# EAGLE board Qwiic_pHat_for_Raspberry_Pi_v30-Panel (EAGLE 9.4.2)
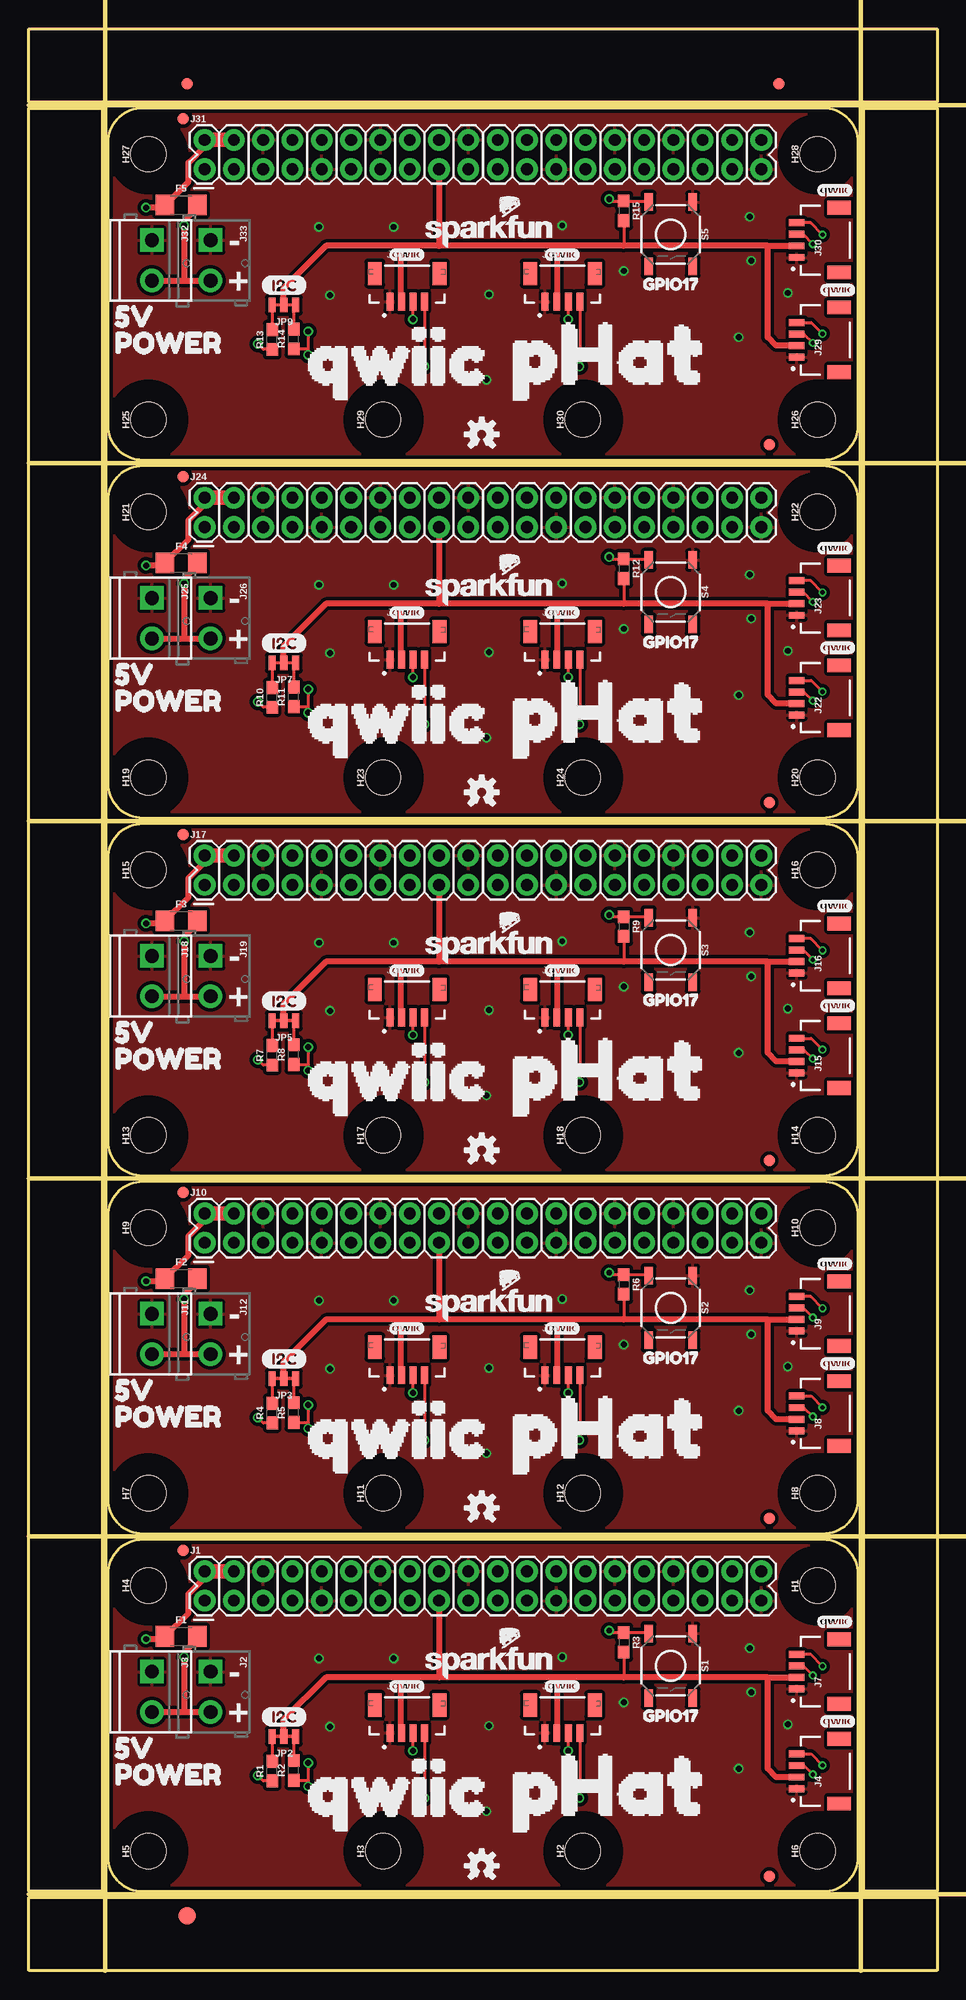
[diagram p0: board, top side]
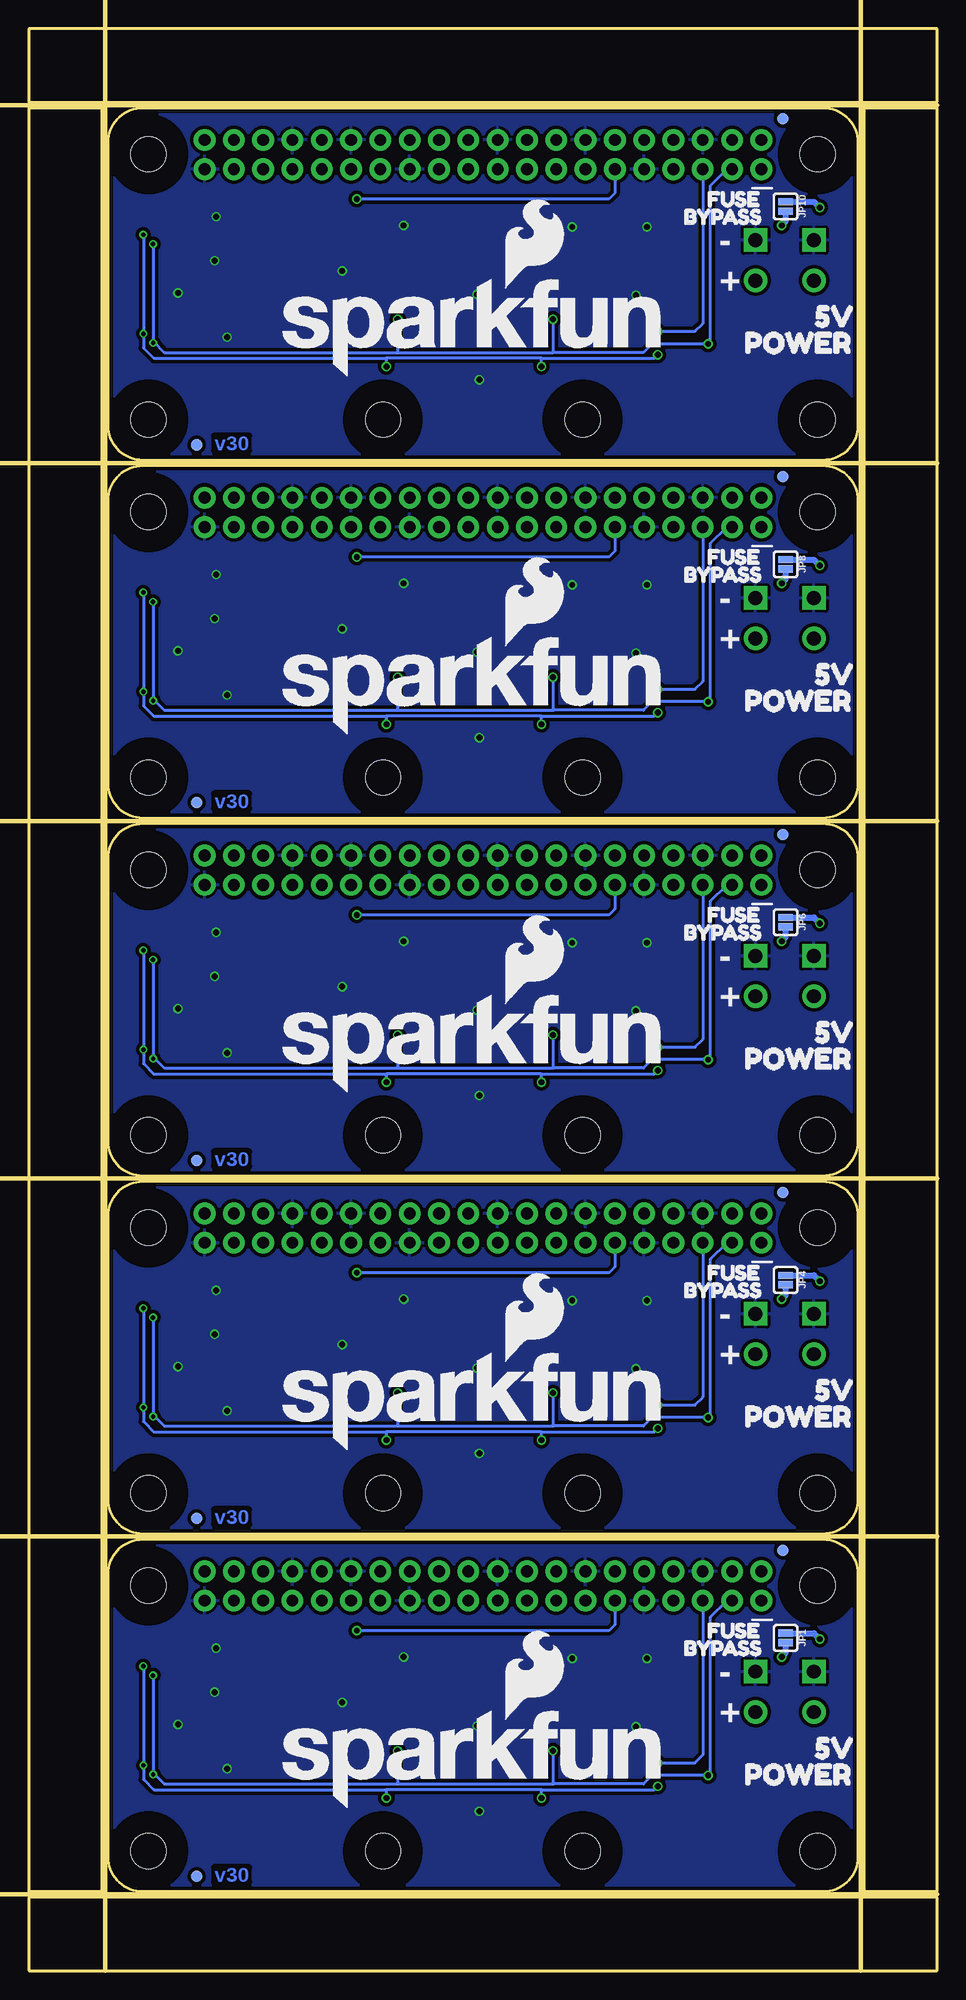
[diagram p1: board, bottom side, seen from below]

Size 78.72 x 168.25 mm. Coordinates in mm from the lower left corner, seen from the top.
Outline: 9.86,6.86 68.86,6.86 arc90 71.86,9.86 71.86,34.36 arc90 68.86,37.36 9.86,37.36 arc90 6.86,34.36 6.86,9.86 arc90 9.86,6.86
Outline: 9.86,37.87 68.86,37.87 arc90 71.86,40.87 71.86,65.37 arc90 68.86,68.37 9.86,68.37 arc90 6.86,65.37 6.86,40.87 arc90 9.86,37.87
Outline: 9.86,68.87 68.86,68.87 arc90 71.86,71.87 71.86,96.37 arc90 68.86,99.37 9.86,99.37 arc90 6.86,96.37 6.86,71.87 arc90 9.86,68.87
Outline: 9.86,99.88 68.86,99.88 arc90 71.86,102.88 71.86,127.38 arc90 68.86,130.38 9.86,130.38 arc90 6.86,127.38 6.86,102.88 arc90 9.86,99.88
Outline: 9.86,130.89 68.86,130.89 arc90 71.86,133.89 71.86,158.39 arc90 68.86,161.39 9.86,161.39 arc90 6.86,158.39 6.86,133.89 arc90 9.86,130.89
Outline: 0,6.35 78.72,6.35 78.72,0 0,0 0,6.35
Outline: 72.37,161.39 78.72,161.39 78.72,6.86 72.37,6.86 72.37,161.39
Outline: 0,168.25 78.72,168.25 78.72,161.9 0,161.9 0,168.25
Outline: 0,161.39 6.35,161.39 6.35,6.86 0,6.86 0,161.39
Copper layers (1*16): Top 0.035mm / dielectric 1.5mm / Bottom 0.035mm
Design rules "SparkFun-2-layer-PCBWay-LIMIT": minimum track width 6mil, minimum drill 0.3mm, track to track 6mil, track to pad 6mil, pad to pad 6mil, via to via 6mil, smd to smd 6mil, copper to edge 6mil, drill to drill 6mil, minimum pad ring 6mil, minimum via ring 6mil, stop-mask expansion 4mil, vias tented up to drill 25mil, thermal gap 10mil
Net classes: 0 Default: width 0.178 mm; 1 vcc: width 0.178 mm
tRestrict: area 7.2,7.2 to 13.5,13.5; area 65.2,7.2 to 71.5,13.5; area 65.2,30.2 to 71.5,36.5; area 7.2,30.2 to 13.5,36.5; area 44.9,7.2 to 51.2,13.5; area 27.6,7.2 to 33.9,13.5; area 7.2,38.2 to 13.5,44.5; area 65.2,38.2 to 71.5,44.5; area 65.2,61.2 to 71.5,67.5; area 7.2,61.2 to 13.5,67.5; area 44.9,38.2 to 51.2,44.5; area 27.6,38.2 to 33.9,44.5; area 7.2,69.2 to 13.5,75.5; area 65.2,69.2 to 71.5,75.5; area 65.2,92.2 to 71.5,98.5; area 7.2,92.2 to 13.5,98.5; area 44.9,69.2 to 51.2,75.5; area 27.6,69.2 to 33.9,75.5; area 7.2,100.2 to 13.5,106.5; area 65.2,100.2 to 71.5,106.5; area 65.2,123.2 to 71.5,129.5; area 7.2,123.2 to 13.5,129.5; area 44.9,100.2 to 51.2,106.5; area 27.6,100.2 to 33.9,106.5; area 7.2,131.2 to 13.5,137.5; area 65.2,131.2 to 71.5,137.5; area 65.2,154.2 to 71.5,160.5; area 7.2,154.2 to 13.5,160.5; area 44.9,131.2 to 51.2,137.5; area 27.6,131.2 to 33.9,137.5
bRestrict: area 65.2,7.2 to 71.5,13.5; area 7.2,7.2 to 13.5,13.5; area 7.2,30.2 to 13.5,36.5; area 65.2,30.2 to 71.5,36.5; area 44.9,7.2 to 51.2,13.5; area 27.6,7.2 to 33.9,13.5; area 65.2,38.2 to 71.5,44.5; area 7.2,38.2 to 13.5,44.5; area 7.2,61.2 to 13.5,67.5; area 65.2,61.2 to 71.5,67.5; area 44.9,38.2 to 51.2,44.5; area 27.6,38.2 to 33.9,44.5; area 65.2,69.2 to 71.5,75.5; area 7.2,69.2 to 13.5,75.5; area 7.2,92.2 to 13.5,98.5; area 65.2,92.2 to 71.5,98.5; area 44.9,69.2 to 51.2,75.5; area 27.6,69.2 to 33.9,75.5; area 65.2,100.2 to 71.5,106.5; area 7.2,100.2 to 13.5,106.5; area 7.2,123.2 to 13.5,129.5; area 65.2,123.2 to 71.5,129.5; area 44.9,100.2 to 51.2,106.5; area 27.6,100.2 to 33.9,106.5; area 65.2,131.2 to 71.5,137.5; area 7.2,131.2 to 13.5,137.5; area 7.2,154.2 to 13.5,160.5; area 65.2,154.2 to 71.5,160.5; area 44.9,131.2 to 51.2,137.5; area 27.6,131.3 to 33.9,137.6
Milling: 8 lines

## Footprints (pad centres in the part's own frame; a part is rotated, then mirrored left to right if it is on the bottom)
FIDUCIAL-1X2 = smd 1 x 1: 1 0,0
FIDUCIAL-1.5X3 = smd 1.5 x 1.5: 1 0,0
1206 = smd 1.6 x 1.8: 1 -1.4,0; 2 1.4,0
STAND-OFF-TIGHT = hole 3.048: 0,0
2X20 = drill 1.016 pad 1.88: 1 0,0; 2 0,2.54; 3 2.54,0; 4 2.54,2.54; 5 5.08,0; 6 5.08,2.54; 7 7.62,0; 8 7.62,2.54; 9 10.16,0; 10 10.16,2.54; 11 12.7,0; 12 12.7,2.54; 13 15.24,0; 14 15.24,2.54; 15 17.78,0; 16 17.78,2.54; 17 20.32,0; 18 20.32,2.54; 19 22.86,0; 20 22.86,2.54; 21 25.4,0; 22 25.4,2.54; 23 27.94,0; 24 27.94,2.54; 25 30.48,0; 26 30.48,2.54; 27 33.02,0; 28 33.02,2.54; 29 35.56,0; 30 35.56,2.54; 31 38.1,0; 32 38.1,2.54; 33 40.64,0; 34 40.64,2.54; 35 43.18,0; 36 43.18,2.54; 37 45.72,0; 38 45.72,2.54; 39 48.26,0; 40 48.26,2.54
SCREWTERMINAL-3.5MM-2-NS = drill 1.2 pad 2.032 square: 1 0,0 | drill 1.2 pad 2.032: 2 3.5,0
SCREWTERMINAL-3.5MM-2 = drill 1.2 pad 2.032 square: 1 0,0 | drill 1.2 pad 2.032: 2 3.5,0
JST04_1MM_RA = smd 0.6 x 1.35: 1 -1.5,0; 2 -0.5,0; 3 0.5,0; 4 1.5,0 | smd 1.2 x 2: NC1 2.8,-3.675; NC2 -2.8,-3.675
JST04_1MM_VERT = smd 0.6 x 1.55: 1 0.3,0.775; 2 1.3,0.775; 3 2.3,0.775; 4 3.3,0.775 | smd 1.2 x 2: NC1 -1,3.2; NC2 4.6,3.2
SMT-JUMPER_2_NO_SILK = smd 0.635 x 1.27: 1 -0.406,0; 2 0.406,0
SMT-JUMPER_3_2-NC_TRACE_NO-SILK = smd 0.635 x 1.27: 1 -1.016,0; 2 0,0; 3 1.016,0
0603 = smd 1.1 x 1: 1 -0.85,0; 2 0.85,0
TACTILE_SWITCH_SMD_5.2MM = smd 1.524 x 0.762: 1 -2.794,1.905; 2 2.794,1.905; 3 -2.794,-1.905; 4 2.794,-1.905

## Placement (x,y rotation side)
E$1  [FIDUCIAL-1X2]  13.72,163.49 0 top
E$2  [FIDUCIAL-1X2]  65,163.49 0 top
E$3  [FIDUCIAL-1.5X3]  13.72,4.76 0 top
F1  6V/0.75A  [1206]  13.21,28.96 0 top
F2  6V/0.75A  [1206]  13.21,59.96 0 top
F3  6V/0.75A  [1206]  13.21,90.97 0 top
F4  6V/0.75A  [1206]  13.21,121.98 0 top
F5  6V/0.75A  [1206]  13.21,152.99 0 top
FD1  FIDUCIAL1X2  [FIDUCIAL-1X2]  13.38,36.42 180 top
FD2  FIDUCIAL1X2  [FIDUCIAL-1X2]  64.19,8.17 180 top
FD3  FIDUCIAL1X2  [FIDUCIAL-1X2]  64.19,8.17 0 bottom
FD4  FIDUCIAL1X2  [FIDUCIAL-1X2]  13.38,36.42 0 bottom
FD5  FIDUCIAL1X2  [FIDUCIAL-1X2]  13.38,67.43 180 top
FD6  FIDUCIAL1X2  [FIDUCIAL-1X2]  64.19,39.18 180 top
FD7  FIDUCIAL1X2  [FIDUCIAL-1X2]  64.19,39.18 0 bottom
FD8  FIDUCIAL1X2  [FIDUCIAL-1X2]  13.38,67.43 0 bottom
FD9  FIDUCIAL1X2  [FIDUCIAL-1X2]  13.38,98.43 180 top
FD10  FIDUCIAL1X2  [FIDUCIAL-1X2]  64.19,70.19 180 top
FD11  FIDUCIAL1X2  [FIDUCIAL-1X2]  64.19,70.18 0 bottom
FD12  FIDUCIAL1X2  [FIDUCIAL-1X2]  13.38,98.43 0 bottom
FD13  FIDUCIAL1X2  [FIDUCIAL-1X2]  13.38,129.44 180 top
FD14  FIDUCIAL1X2  [FIDUCIAL-1X2]  64.19,101.2 180 top
FD15  FIDUCIAL1X2  [FIDUCIAL-1X2]  64.19,101.19 0 bottom
FD16  FIDUCIAL1X2  [FIDUCIAL-1X2]  13.38,129.44 0 bottom
FD17  FIDUCIAL1X2  [FIDUCIAL-1X2]  13.38,160.45 180 top
FD18  FIDUCIAL1X2  [FIDUCIAL-1X2]  64.19,132.2 180 top
FD19  FIDUCIAL1X2  [FIDUCIAL-1X2]  64.19,132.2 0 bottom
FD20  FIDUCIAL1X2  [FIDUCIAL-1X2]  13.38,160.45 0 bottom
FRAME1  FRAME-LETTER  [CREATIVE_COMMONS]  5.33,-6.1 0 top  (outside the outline)
FRAME2  FRAME-LETTER  [CREATIVE_COMMONS]  5.33,24.91 0 top
FRAME3  FRAME-LETTER  [CREATIVE_COMMONS]  5.33,55.92 0 top
FRAME4  FRAME-LETTER  [CREATIVE_COMMONS]  5.33,86.93 0 top
FRAME5  FRAME-LETTER  [CREATIVE_COMMONS]  5.33,117.94 0 top
H1  STAND-OFFTIGHT  [STAND-OFF-TIGHT]  68.36,33.36 90 top
H2  STAND-OFFTIGHT  [STAND-OFF-TIGHT]  48.01,10.36 90 top
H3  STAND-OFFTIGHT  [STAND-OFF-TIGHT]  30.7,10.36 90 top
H4  STAND-OFFTIGHT  [STAND-OFF-TIGHT]  10.36,33.36 90 top
H5  STAND-OFFTIGHT  [STAND-OFF-TIGHT]  10.36,10.36 90 top
H6  STAND-OFFTIGHT  [STAND-OFF-TIGHT]  68.36,10.36 90 top
H7  STAND-OFFTIGHT  [STAND-OFF-TIGHT]  10.36,41.37 90 top
H8  STAND-OFFTIGHT  [STAND-OFF-TIGHT]  68.36,41.37 90 top
H9  STAND-OFFTIGHT  [STAND-OFF-TIGHT]  10.36,64.37 90 top
H10  STAND-OFFTIGHT  [STAND-OFF-TIGHT]  68.36,64.37 90 top
H11  STAND-OFFTIGHT  [STAND-OFF-TIGHT]  30.7,41.37 90 top
H12  STAND-OFFTIGHT  [STAND-OFF-TIGHT]  48.01,41.37 90 top
H13  STAND-OFFTIGHT  [STAND-OFF-TIGHT]  10.36,72.37 90 top
H14  STAND-OFFTIGHT  [STAND-OFF-TIGHT]  68.36,72.37 90 top
H15  STAND-OFFTIGHT  [STAND-OFF-TIGHT]  10.36,95.37 90 top
H16  STAND-OFFTIGHT  [STAND-OFF-TIGHT]  68.36,95.37 90 top
H17  STAND-OFFTIGHT  [STAND-OFF-TIGHT]  30.7,72.37 90 top
H18  STAND-OFFTIGHT  [STAND-OFF-TIGHT]  48.01,72.37 90 top
H19  STAND-OFFTIGHT  [STAND-OFF-TIGHT]  10.36,103.38 90 top
H20  STAND-OFFTIGHT  [STAND-OFF-TIGHT]  68.36,103.38 90 top
H21  STAND-OFFTIGHT  [STAND-OFF-TIGHT]  10.36,126.38 90 top
H22  STAND-OFFTIGHT  [STAND-OFF-TIGHT]  68.36,126.38 90 top
H23  STAND-OFFTIGHT  [STAND-OFF-TIGHT]  30.7,103.38 90 top
H24  STAND-OFFTIGHT  [STAND-OFF-TIGHT]  48.01,103.38 90 top
H25  STAND-OFFTIGHT  [STAND-OFF-TIGHT]  10.36,134.39 90 top
H26  STAND-OFFTIGHT  [STAND-OFF-TIGHT]  68.36,134.39 90 top
H27  STAND-OFFTIGHT  [STAND-OFF-TIGHT]  10.36,157.39 90 top
H28  STAND-OFFTIGHT  [STAND-OFF-TIGHT]  68.36,157.39 90 top
H29  STAND-OFFTIGHT  [STAND-OFF-TIGHT]  30.7,134.39 90 top
H30  STAND-OFFTIGHT  [STAND-OFF-TIGHT]  48.01,134.39 90 top
J1  RASPBERRYPI-40-PIN-GPIO_PTH_NO_SHROUD  [2X20]  15.23,32.06 0 top
J2  [SCREWTERMINAL-3.5MM-2-NS]  15.75,25.91 270 top
J3  [SCREWTERMINAL-3.5MM-2]  10.67,25.91 270 top
J4  Qwiic Right Angle  [JST04_1MM_RA]  66.55,17.27 90 top
J5  Vertical Qwiic Connector  [JST04_1MM_VERT]  30.99,19.81 0 top
J6  Vertical Qwiic Connector  [JST04_1MM_VERT]  44.45,19.81 0 top
J7  Qwiic Right Angle  [JST04_1MM_RA]  66.55,25.91 90 top
J8  Qwiic Right Angle  [JST04_1MM_RA]  66.55,48.28 90 top
J9  Qwiic Right Angle  [JST04_1MM_RA]  66.55,56.92 90 top
J10  RASPBERRYPI-40-PIN-GPIO_PTH_NO_SHROUD  [2X20]  15.23,63.07 0 top
J11  [SCREWTERMINAL-3.5MM-2]  10.67,56.92 270 top
J12  [SCREWTERMINAL-3.5MM-2-NS]  15.75,56.92 270 top
J13  Vertical Qwiic Connector  [JST04_1MM_VERT]  30.99,50.82 0 top
J14  Vertical Qwiic Connector  [JST04_1MM_VERT]  44.45,50.82 0 top
J15  Qwiic Right Angle  [JST04_1MM_RA]  66.55,79.29 90 top
J16  Qwiic Right Angle  [JST04_1MM_RA]  66.55,87.92 90 top
J17  RASPBERRYPI-40-PIN-GPIO_PTH_NO_SHROUD  [2X20]  15.23,94.07 0 top
J18  [SCREWTERMINAL-3.5MM-2]  10.67,87.92 270 top
J19  [SCREWTERMINAL-3.5MM-2-NS]  15.75,87.92 270 top
J20  Vertical Qwiic Connector  [JST04_1MM_VERT]  30.99,81.83 0 top
J21  Vertical Qwiic Connector  [JST04_1MM_VERT]  44.45,81.83 0 top
J22  Qwiic Right Angle  [JST04_1MM_RA]  66.55,110.3 90 top
J23  Qwiic Right Angle  [JST04_1MM_RA]  66.55,118.93 90 top
J24  RASPBERRYPI-40-PIN-GPIO_PTH_NO_SHROUD  [2X20]  15.23,125.08 0 top
J25  [SCREWTERMINAL-3.5MM-2]  10.67,118.93 270 top
J26  [SCREWTERMINAL-3.5MM-2-NS]  15.75,118.93 270 top
J27  Vertical Qwiic Connector  [JST04_1MM_VERT]  30.99,112.84 0 top
J28  Vertical Qwiic Connector  [JST04_1MM_VERT]  44.45,112.84 0 top
J29  Qwiic Right Angle  [JST04_1MM_RA]  66.55,141.3 90 top
J30  Qwiic Right Angle  [JST04_1MM_RA]  66.55,149.94 90 top
J31  RASPBERRYPI-40-PIN-GPIO_PTH_NO_SHROUD  [2X20]  15.23,156.09 0 top
J32  [SCREWTERMINAL-3.5MM-2]  10.67,149.94 270 top
J33  [SCREWTERMINAL-3.5MM-2-NS]  15.75,149.94 270 top
J34  Vertical Qwiic Connector  [JST04_1MM_VERT]  30.99,143.84 0 top
J35  Vertical Qwiic Connector  [JST04_1MM_VERT]  44.45,143.84 0 top
JP1  JUMPER-SMT_2_NO_SILK  [SMT-JUMPER_2_NO_SILK]  13.13,28.83 270 bottom
JP2  PULLUP  [SMT-JUMPER_3_2-NC_TRACE_NO-SILK]  22.1,20.29 180 top
JP3  PULLUP  [SMT-JUMPER_3_2-NC_TRACE_NO-SILK]  22.1,51.3 180 top
JP4  JUMPER-SMT_2_NO_SILK  [SMT-JUMPER_2_NO_SILK]  13.13,59.84 270 bottom
JP5  PULLUP  [SMT-JUMPER_3_2-NC_TRACE_NO-SILK]  22.1,82.31 180 top
JP6  JUMPER-SMT_2_NO_SILK  [SMT-JUMPER_2_NO_SILK]  13.13,90.85 270 bottom
JP7  PULLUP  [SMT-JUMPER_3_2-NC_TRACE_NO-SILK]  22.1,113.32 180 top
JP8  JUMPER-SMT_2_NO_SILK  [SMT-JUMPER_2_NO_SILK]  13.13,121.85 270 bottom
JP9  PULLUP  [SMT-JUMPER_3_2-NC_TRACE_NO-SILK]  22.1,144.32 180 top
JP10  JUMPER-SMT_2_NO_SILK  [SMT-JUMPER_2_NO_SILK]  13.13,152.86 270 bottom
LOGO1  REVISION  [REVISION]  16.76,-8.64 0 top  (outside the outline)
LOGO2  OSHW-LOGOS  [OSHW-LOGO-S]  39.24,9.08 0 top
LOGO3  SFE_LOGO_NAME.1_INCH  [SFE_LOGO_NAME_.1]  39.88,26.67 0 top
LOGO4  REVISION  [REVISION]  16.76,22.37 0 top
LOGO5  OSHW-LOGOS  [OSHW-LOGO-S]  39.24,40.09 0 top
LOGO6  SFE_LOGO_NAME.1_INCH  [SFE_LOGO_NAME_.1]  39.88,57.68 0 top
LOGO7  REVISION  [REVISION]  16.76,53.38 0 top
LOGO8  OSHW-LOGOS  [OSHW-LOGO-S]  39.24,71.1 0 top
LOGO9  SFE_LOGO_NAME.1_INCH  [SFE_LOGO_NAME_.1]  39.88,88.69 0 top
LOGO10  REVISION  [REVISION]  16.76,84.39 0 top
LOGO11  OSHW-LOGOS  [OSHW-LOGO-S]  39.24,102.1 0 top
LOGO12  SFE_LOGO_NAME.1_INCH  [SFE_LOGO_NAME_.1]  39.88,119.69 0 top
LOGO13  REVISION  [REVISION]  16.76,115.4 0 top
LOGO14  OSHW-LOGOS  [OSHW-LOGO-S]  39.24,133.11 0 top
LOGO15  SFE_LOGO_NAME.1_INCH  [SFE_LOGO_NAME_.1]  39.88,150.7 0 top
R1  2.2k  [0603]  21.09,17.3 90 top
R2  2.2k  [0603]  22.95,17.35 90 top
R3  10k  [0603]  51.56,28.45 270 top
R4  2.2k  [0603]  21.09,48.3 90 top
R5  2.2k  [0603]  22.95,48.36 90 top
R6  10k  [0603]  51.56,59.46 270 top
R7  2.2k  [0603]  21.09,79.31 90 top
R8  2.2k  [0603]  22.95,79.36 90 top
R9  10k  [0603]  51.56,90.46 270 top
R10  2.2k  [0603]  21.09,110.32 90 top
R11  2.2k  [0603]  22.95,110.37 90 top
R12  10k  [0603]  51.56,121.47 270 top
R13  2.2k  [0603]  21.09,141.33 90 top
R14  2.2k  [0603]  22.95,141.38 90 top
R15  10k  [0603]  51.56,152.48 270 top
S1  BUTTON GPI017  [TACTILE_SWITCH_SMD_5.2MM]  55.63,26.42 270 top
S2  BUTTON GPI017  [TACTILE_SWITCH_SMD_5.2MM]  55.63,57.42 270 top
S3  BUTTON GPI017  [TACTILE_SWITCH_SMD_5.2MM]  55.63,88.43 270 top
S4  BUTTON GPI017  [TACTILE_SWITCH_SMD_5.2MM]  55.63,119.44 270 top
S5  BUTTON GPI017  [TACTILE_SWITCH_SMD_5.2MM]  55.63,150.45 270 top
U$1  [PIE_1F967#PNG]  41.66,28.96 20 top
U$2  [I2C-()]  20.12,22 0 top
U$3  [PHAT0]  37.15,16.1 0 top
U$4  [PHAT0]  37.15,47.1 0 top
U$5  [I2C-()]  20.12,53 0 top
U$6  [FUSE0]  21.08,29.46 0 bottom
U$7  [BYPASS1]  23.11,27.94 0 bottom
U$8  [QWIIC_3MM]  46.23,24.64 0 top
U$9  [GPIO173]  52.32,22.1 0 top
U$10  [SFE_LOGO_NAME_FLAME_.3]  40.39,18.29 0 bottom
U$11  [QWIIC_3MM]  69.85,30.23 0 top
U$12  [5V0]  5.84,19.3 0 top
U$13  [POWER1]  5.84,17.02 0 top
U$14  [POWER1]  18.29,17.02 0 bottom
U$15  [5V0]  12.19,19.3 0 bottom
U$16  [QWIIC_3MM]  70.1,21.59 0 top
U$17  [QWIIC_3MM]  32.77,24.64 0 top
U$18  [QWIIC0]  20.07,15.75 0 top
U$19  [GPIO173]  52.32,53.11 0 top
U$20  [FUSE0]  21.08,60.47 0 bottom
U$21  [BYPASS1]  23.11,58.95 0 bottom
U$22  [QWIIC_3MM]  69.85,61.23 0 top
U$23  [5V0]  5.84,50.31 0 top
U$24  [POWER1]  5.84,48.03 0 top
U$25  [POWER1]  18.29,48.03 0 bottom
U$26  [5V0]  12.19,50.31 0 bottom
U$27  [QWIIC_3MM]  70.1,52.6 0 top
U$28  [QWIIC_3MM]  46.23,55.65 0 top
U$29  [QWIIC_3MM]  32.77,55.65 0 top
U$30  [QWIIC0]  20.07,46.76 0 top
U$31  [PIE_1F967#PNG]  41.66,59.96 20 top
U$32  [SFE_LOGO_NAME_FLAME_.3]  40.39,49.3 0 bottom
U$33  [PHAT0]  37.15,78.11 0 top
U$34  [I2C-()]  20.12,84.01 0 top
U$35  [GPIO173]  52.32,84.11 0 top
U$36  [FUSE0]  21.08,91.48 0 bottom
U$37  [BYPASS1]  23.11,89.96 0 bottom
U$38  [QWIIC_3MM]  69.85,92.24 0 top
U$39  [5V0]  5.84,81.32 0 top
U$40  [POWER1]  5.84,79.03 0 top
U$41  [POWER1]  18.29,79.03 0 bottom
U$42  [5V0]  12.19,81.32 0 bottom
U$43  [QWIIC_3MM]  70.1,83.61 0 top
U$44  [QWIIC_3MM]  46.23,86.65 0 top
U$45  [QWIIC_3MM]  32.77,86.65 0 top
U$46  [QWIIC0]  20.07,77.76 0 top
U$47  [PIE_1F967#PNG]  41.66,90.97 20 top
U$48  [SFE_LOGO_NAME_FLAME_.3]  40.39,80.3 0 bottom
U$49  [PHAT0]  37.15,109.12 0 top
U$50  [I2C-()]  20.12,115.02 0 top
U$51  [GPIO173]  52.32,115.12 0 top
U$52  [FUSE0]  21.08,122.49 0 bottom
U$53  [BYPASS1]  23.11,120.96 0 bottom
U$54  [QWIIC_3MM]  69.85,123.25 0 top
U$55  [5V0]  5.84,112.33 0 top
U$56  [POWER1]  5.84,110.04 0 top
U$57  [POWER1]  18.29,110.04 0 bottom
U$58  [5V0]  12.19,112.33 0 bottom
U$59  [QWIIC_3MM]  70.1,114.61 0 top
U$60  [QWIIC_3MM]  46.23,117.66 0 top
U$61  [QWIIC_3MM]  32.77,117.66 0 top
U$62  [QWIIC0]  20.07,108.77 0 top
U$63  [PIE_1F967#PNG]  41.66,121.98 20 top
U$64  [SFE_LOGO_NAME_FLAME_.3]  40.39,111.31 0 bottom
U$65  [PHAT0]  37.15,140.13 0 top
U$66  [I2C-()]  20.12,146.03 0 top
U$67  [GPIO173]  52.32,146.13 0 top
U$68  [FUSE0]  21.08,153.5 0 bottom
U$69  [BYPASS1]  23.11,151.97 0 bottom
U$70  [QWIIC_3MM]  69.85,154.26 0 top
U$71  [5V0]  5.84,143.34 0 top
U$72  [POWER1]  5.84,141.05 0 top
U$73  [POWER1]  18.29,141.05 0 bottom
U$74  [5V0]  12.19,143.34 0 bottom
U$75  [QWIIC_3MM]  70.1,145.62 0 top
U$76  [QWIIC_3MM]  46.23,148.67 0 top
U$77  [QWIIC_3MM]  32.77,148.67 0 top
U$78  [QWIIC0]  20.07,139.78 0 top
U$79  [PIE_1F967#PNG]  41.66,152.99 20 top
U$80  [SFE_LOGO_NAME_FLAME_.3]  40.39,142.32 0 bottom

## Library data of the parts
E$1 E$2 FD1-FD20 FRAME1-FRAME5 LOGO1-LOGO15 U$8 U$10 U$11 U$16 U$17 U$22 U$27-U$29 U$32 U$38 U$43-U$45 U$48 U$54 U$59-U$61 U$64 U$70 U$75-U$77 U$80 = SparkFun-Aesthetics
E$3 = SparkFun-Retired
F1-F5 = SparkFun-Fuses; PROD_ID: RES-11150
H1-H30 = SparkFun-Hardware
J1 J10 J17 J24 J31 = SparkFun-Connectors
J2 J3 J11 J12 J18 J19 J25 J26 J32 J33 = SparkFun-Connectors; PROD_ID: CONN-08399
J4 J7-J9 J15 J16 J22 J23 J29 J30 = SparkFun-Connectors; PROD_ID: CONN-13694
J5 J6 J13 J14 J20 J21 J27 J28 J34 J35 = SparkFun-Connectors; PROD_ID: CONN-14483
JP1-JP10 = SparkFun-Jumpers
R1 R2 R4 R5 R7 R8 R10 R11 R13 R14 = SparkFun-Resistors; PROD_ID: RES-08272
R3 R6 R9 R12 R15 = SparkFun-Resistors; PROD_ID: RES-00824
S1-S5 = SparkFun-Switches; PROD_ID: SWCH-14139
U$1 U$31 U$47 U$63 U$79 = pie_1f967#png
U$2 U$5 U$34 U$50 U$66 = Labels
U$3 U$4 U$33 U$49 U$65 = MicroPiHat
U$6 U$7 U$20 U$21 U$36 U$37 U$52 U$53 U$68 U$69 = Fuse Bypass
U$9 U$19 U$35 U$51 U$67 = All labels
U$12-U$15 U$23-U$26 U$39-U$42 U$55-U$58 U$71-U$74 = POWER
U$18 U$30 U$46 U$62 U$78 = Qwiic

## Nets
3.3V: J1.17 J4.2 J5.2 J6.2 J7.2 JP2.2 R3.2
3.3V1: J8.2 J9.2 J10.17 J13.2 J14.2 JP3.2 R6.2
3.3V2: J15.2 J16.2 J17.17 J20.2 J21.2 JP5.2 R9.2
3.3V3: J22.2 J23.2 J24.17 J27.2 J28.2 JP7.2 R12.2
3.3V4: J29.2 J30.2 J31.17 J34.2 J35.2 JP9.2 R15.2
5V: F1.2 J2.2 J3.2 JP1.2
5V1: F2.2 J11.2 J12.2 JP4.2
5V2: F3.2 J18.2 J19.2 JP6.2
5V3: F4.2 J25.2 J26.2 JP8.2
5V4: F5.2 J32.2 J33.2 JP10.2
BUTTON/D1: J10.11 R6.1 S2.3
BUTTON/D2: J17.11 R9.1 S3.3
BUTTON/D3: J24.11 R12.1 S4.3
BUTTON/D4: J31.11 R15.1 S5.3
BUTTON/D17: J1.11 R3.1 S1.3
D1: J10.29
D2: J10.31
D3: J10.32
D4: J1.7
D5: J1.29
D6: J1.31
D7: J10.33
D8: J10.36
D9: J10.12
D10: J10.35
D11: J10.38
D12: J1.32
D13: J1.33
D14: J10.40
D15: J10.15
D16: J1.36
D17: J10.16
D18: J1.12
D19: J1.35
D20: J1.38
D21: J1.40
D22: J1.15
D23: J1.16
D24: J1.18
D25: J1.22
D26: J1.37
D27: J1.13
D28: J10.18
D29: J10.22
D30: J10.37
D31: J10.13
D32: J10.7
D33: J17.29
D34: J17.31
D35: J17.32
D36: J17.33
D37: J17.36
D38: J17.12
D39: J17.35
D40: J17.38
D41: J17.40
D42: J17.15
D43: J17.16
D44: J17.18
D45: J17.22
D46: J17.37
D47: J17.13
D48: J17.7
D49: J24.29
D50: J24.31
D51: J24.32
D52: J24.33
D53: J24.36
D54: J24.12
D55: J24.35
D56: J24.38
D57: J24.40
D58: J24.15
D59: J24.16
D60: J24.18
D61: J24.22
D62: J24.37
D63: J24.13
D64: J24.7
D65: J31.29
D66: J31.31
D67: J31.32
D68: J31.33
D69: J31.36
D70: J31.12
D71: J31.35
D72: J31.38
D73: J31.40
D74: J31.15
D75: J31.16
D76: J31.18
D77: J31.22
D78: J31.37
D79: J31.13
D80: J31.7
GND [vcc]: J1.6 J1.9 J1.14 J1.20 J1.25 J1.30 J1.34 J1.39 J2.1 J3.1 J4.1 J5.1 J6.1 J7.1 S1.1
GND1 [vcc]: J8.1 J9.1 J10.6 J10.9 J10.14 J10.20 J10.25 J10.30 J10.34 J10.39 J11.1 J12.1 J13.1 J14.1 S2.1
GND2 [vcc]: J15.1 J16.1 J17.6 J17.9 J17.14 J17.20 J17.25 J17.30 J17.34 J17.39 J18.1 J19.1 J20.1 J21.1 S3.1
GND3 [vcc]: J22.1 J23.1 J24.6 J24.9 J24.14 J24.20 J24.25 J24.30 J24.34 J24.39 J25.1 J26.1 J27.1 J28.1 S4.1
GND4 [vcc]: J29.1 J30.1 J31.6 J31.9 J31.14 J31.20 J31.25 J31.30 J31.34 J31.39 J32.1 J33.1 J34.1 J35.1 S5.1
ID_SCL: J1.28
ID_SCL1: J10.28
ID_SCL2: J17.28
ID_SCL3: J24.28
ID_SCL4: J31.28
ID_SDA: J1.27
ID_SDA1: J10.27
ID_SDA2: J17.27
ID_SDA3: J24.27
ID_SDA4: J31.27
MISO: J1.21
MISO1: J10.21
MISO2: J17.21
MISO3: J24.21
MISO4: J31.21
MOSI: J1.19
MOSI1: J10.19
MOSI2: J17.19
MOSI3: J24.19
MOSI4: J31.19
N$1: J1.1
N$2: F1.1 J1.2 J1.4 JP1.1
N$3: JP2.3 R1.2
N$4: JP2.1 R2.2
N$5: JP3.3 R4.2
N$6: JP3.1 R5.2
N$7: F2.1 J10.2 J10.4 JP4.1
N$8: J10.1
N$9: JP5.3 R7.2
N$10: JP5.1 R8.2
N$11: F3.1 J17.2 J17.4 JP6.1
N$12: J17.1
N$13: JP7.3 R10.2
N$14: JP7.1 R11.2
N$15: F4.1 J24.2 J24.4 JP8.1
N$16: J24.1
N$17: JP9.3 R13.2
N$18: JP9.1 R14.2
N$19: F5.1 J31.2 J31.4 JP10.1
N$20: J31.1
RX: J1.10
RX1: J10.10
RX2: J17.10
RX3: J24.10
RX4: J31.10
SCK: J1.23
SCK1: J10.23
SCK2: J17.23
SCK3: J24.23
SCK4: J31.23
SCL: J1.5 J4.4 J5.4 J6.4 J7.4 R2.1
SCL1: J8.4 J9.4 J10.5 J13.4 J14.4 R5.1
SCL2: J15.4 J16.4 J17.5 J20.4 J21.4 R8.1
SCL3: J22.4 J23.4 J24.5 J27.4 J28.4 R11.1
SCL4: J29.4 J30.4 J31.5 J34.4 J35.4 R14.1
SDA: J1.3 J4.3 J5.3 J6.3 J7.3 R1.1
SDA1: J8.3 J9.3 J10.3 J13.3 J14.3 R4.1
SDA2: J15.3 J16.3 J17.3 J20.3 J21.3 R7.1
SDA3: J22.3 J23.3 J24.3 J27.3 J28.3 R10.1
SDA4: J29.3 J30.3 J31.3 J34.3 J35.3 R13.1
TX: J1.8
TX1: J10.8
TX2: J17.8
TX3: J24.8
TX4: J31.8

## Tracks (layer width: path | path; a pad name or v marks a point on that pad's centre or on a via)
3.3V
  Top 0.254: R3.2 51.56,25.41
  Top 0.508: J4.2 64.76,16.77 64.03,17.5 64.03,25.41 | 64.03,25.41 51.56,25.41 45.97,25.41 | 45.97,25.41 35.56,25.41 | 35.56,25.41 35.55,25.42 J1.17 | 35.56,25.41 32.26,25.41 | 32.26,25.41 25.75,25.41 22.1,21.75 JP2.2 | 64.03,25.41 J7.2 | 45.97,25.41 45.75,25.18 J6.2 | J5.2 32.26,20.62 32.26,25.41
3.3V1
  Top 0.254: R6.2 51.56,56.42
  Top 0.508: J8.2 64.76,47.78 64.03,48.51 64.03,56.42 | 64.03,56.42 51.56,56.42 45.97,56.42 | 45.97,56.42 35.56,56.42 | 35.56,56.42 35.55,56.43 J10.17 | 35.56,56.42 32.26,56.42 | 32.26,56.42 25.75,56.42 22.1,52.76 JP3.2 | 64.03,56.42 J9.2 | 45.97,56.42 45.75,56.19 J14.2 | J13.2 32.26,51.62 32.26,56.42
3.3V2
  Top 0.254: R9.2 51.56,87.42
  Top 0.508: J15.2 64.76,78.79 64.03,79.52 64.03,87.42 | 64.03,87.42 51.56,87.42 45.97,87.42 | 45.97,87.42 35.56,87.42 | 35.56,87.42 35.55,87.44 J17.17 | 35.56,87.42 32.26,87.42 | 32.26,87.42 25.75,87.42 22.1,83.77 JP5.2 | 64.03,87.42 J16.2 | 45.97,87.42 45.75,87.2 J21.2 | J20.2 32.26,82.63 32.26,87.42
3.3V3
  Top 0.254: R12.2 51.56,118.43
  Top 0.508: J22.2 64.76,109.8 64.03,110.53 64.03,118.43 | 64.03,118.43 51.56,118.43 45.97,118.43 | 45.97,118.43 35.56,118.43 | 35.56,118.43 35.55,118.44 J24.17 | 35.56,118.43 32.26,118.43 | 32.26,118.43 25.75,118.43 22.1,114.78 JP7.2 | 64.03,118.43 J23.2 | 45.97,118.43 45.75,118.21 J28.2 | J27.2 32.26,113.64 32.26,118.43
3.3V4
  Top 0.254: R15.2 51.56,149.44
  Top 0.508: J29.2 64.76,140.81 64.03,141.53 64.03,149.44 | 64.03,149.44 51.56,149.44 45.97,149.44 | 45.97,149.44 35.56,149.44 | 35.56,149.44 35.55,149.45 J31.17 | 35.56,149.44 32.26,149.44 | 32.26,149.44 25.75,149.44 22.1,145.79 JP9.2 | 64.03,149.44 J30.2 | 45.97,149.44 45.75,149.22 J35.2 | J34.2 32.26,144.65 32.26,149.44
5V  (via drill 0.51)
  Top 0.508: F1.2 14.61,28.71 13.46,27.56 v13.46,27.18 13.46,22.41 | J3.2 13.46,22.41 | 13.46,22.41 J2.2
  Bottom 0.508: JP1.2 13.13,27.51 v13.46,27.18
5V1  (via drill 0.51)
  Top 0.508: F2.2 14.61,59.71 13.46,58.57 v13.46,58.19 13.46,53.42 | J11.2 13.46,53.42 | 13.46,53.42 J12.2
  Bottom 0.508: JP4.2 13.13,58.52 v13.46,58.19
5V2  (via drill 0.51)
  Top 0.508: F3.2 14.61,90.72 13.46,89.58 v13.46,89.19 13.46,84.42 | J18.2 13.46,84.42 | 13.46,84.42 J19.2
  Bottom 0.508: JP6.2 13.13,89.52 v13.46,89.19
5V3  (via drill 0.51)
  Top 0.508: F4.2 14.61,121.73 13.46,120.58 v13.46,120.2 13.46,115.43 | J25.2 13.46,115.43 | 13.46,115.43 J26.2
  Bottom 0.508: JP8.2 13.13,120.53 v13.46,120.2
5V4  (via drill 0.51)
  Top 0.508: F5.2 14.61,152.74 13.46,151.59 v13.46,151.21 13.46,146.44 | J32.2 13.46,146.44 | 13.46,146.44 J33.2
  Bottom 0.508: JP10.2 13.13,151.54 v13.46,151.21
BUTTON/D1  (via drill 0.51)
  Top 0.254: S2.3 53.63,60.31 R6.1 50.46,60.31 v50.29,60.47
  Bottom 0.254: J10.11 27.94,63.05 27.94,60.98 28.45,60.47 v50.29,60.47
BUTTON/D2  (via drill 0.51)
  Top 0.254: S3.3 53.63,91.31 R9.1 50.46,91.31 v50.29,91.48
  Bottom 0.254: J17.11 27.94,94.06 27.94,91.99 28.45,91.48 v50.29,91.48
BUTTON/D3  (via drill 0.51)
  Top 0.254: S4.3 53.63,122.32 R12.1 50.46,122.32 v50.29,122.49
  Bottom 0.254: J24.11 27.94,125.07 27.94,123 28.45,122.49 v50.29,122.49
BUTTON/D4  (via drill 0.51)
  Top 0.254: S5.3 53.63,153.33 R15.1 50.46,153.33 v50.29,153.5
  Bottom 0.254: J31.11 27.94,156.08 27.94,154 28.45,153.5 v50.29,153.5
BUTTON/D17  (via drill 0.51)
  Top 0.254: S1.3 53.63,29.3 R3.1 50.46,29.3 v50.29,29.46
  Bottom 0.254: J1.11 27.94,32.05 27.94,29.97 28.45,29.46 v50.29,29.46
GND  (via drill 0.51)
  other vias: 62.48,27.94 65.79,21.34 62.61,24.13 25.15,27.05 31.62,27.05 39.88,21.21 51.56,23.24 46.23,27.18 26.1,21.14 39.67,13.81 61.53,17.5
  pour Top (isolate 0.305): 6.86,37.36 71.88,37.36 71.88,6.86 6.86,6.86
  pour Bottom (isolate 0.305): 6.86,37.36 71.88,37.36 71.88,6.86 6.86,6.86
GND1  (via drill 0.51)
  other vias: 62.48,58.95 65.79,52.34 62.61,55.14 25.15,58.06 31.62,58.06 39.88,52.22 51.56,54.25 46.23,58.19 26.1,52.15 39.67,44.82 61.53,48.51
  pour Top (isolate 0.305): 6.86,68.37 71.88,68.37 71.88,37.87 6.86,37.87
  pour Bottom (isolate 0.305): 6.86,68.37 71.88,68.37 71.88,37.87 6.86,37.87
GND2  (via drill 0.51)
  other vias: 62.48,89.96 65.79,83.35 62.61,86.15 25.15,89.07 31.62,89.07 39.88,83.23 51.56,85.26 46.23,89.19 26.1,83.16 39.67,75.83 61.53,79.52
  pour Top (isolate 0.305): 6.86,99.38 71.88,99.38 71.88,68.87 6.86,68.87
  pour Bottom (isolate 0.305): 6.86,99.38 71.88,99.38 71.88,68.87 6.86,68.87
GND3  (via drill 0.51)
  other vias: 62.48,120.96 65.79,114.36 62.61,117.15 25.15,120.07 31.62,120.07 39.88,114.23 51.56,116.26 46.23,120.2 26.1,114.16 39.67,106.84 61.53,110.53
  pour Top (isolate 0.305): 6.86,130.39 71.88,130.39 71.88,99.88 6.86,99.88
  pour Bottom (isolate 0.305): 6.86,130.39 71.88,130.39 71.88,99.88 6.86,99.88
GND4  (via drill 0.51)
  other vias: 62.48,151.97 65.79,145.37 62.61,148.16 25.15,151.08 31.62,151.08 39.88,145.24 51.56,147.27 46.23,151.21 26.1,145.17 39.67,137.84 61.53,141.54
  pour Top (isolate 0.305): 6.86,161.4 71.88,161.4 71.88,130.89 6.86,130.89
  pour Bottom (isolate 0.305): 6.86,161.4 71.88,161.4 71.88,130.89 6.86,130.89
N$2  (via drill 0.51)
  Top 0.508: J1.2 15.23,34.03 13.83,32.64 13.83,30.98 F1.1 11.58,28.73 v10.16,28.73
  Top 1.27: J1.2 J1.4
  Bottom 0.508: JP1.1 10.67,29.23 v10.16,28.73
N$3
  Top 0.254: R1.2 21.08,18.16 JP2.3
N$4
  Top 0.254: JP2.1 22.95,20.13 R2.2
N$5
  Top 0.254: R4.2 21.08,49.17 JP3.3
N$6
  Top 0.254: JP3.1 22.95,51.14 R5.2
N$7  (via drill 0.51)
  Top 0.508: J10.2 15.23,65.04 13.83,63.64 13.83,61.99 F2.1 11.58,59.73 v10.16,59.73
  Top 1.27: J10.2 J10.4
  Bottom 0.508: JP4.1 10.67,60.24 v10.16,59.73
N$9
  Top 0.254: R7.2 21.08,80.17 JP5.3
N$10
  Top 0.254: JP5.1 22.95,82.15 R8.2
N$11  (via drill 0.51)
  Top 0.508: J17.2 15.23,96.05 13.83,94.65 13.83,93 F3.1 11.58,90.74 v10.16,90.74
  Top 1.27: J17.2 J17.4
  Bottom 0.508: JP6.1 10.67,91.25 v10.16,90.74
N$13
  Top 0.254: R10.2 21.08,111.18 JP7.3
N$14
  Top 0.254: JP7.1 22.95,113.16 R11.2
N$15  (via drill 0.51)
  Top 0.508: J24.2 15.23,127.06 13.83,125.66 13.83,124 F4.1 11.58,121.75 v10.16,121.75
  Top 1.27: J24.2 J24.4
  Bottom 0.508: JP8.1 10.67,122.26 v10.16,121.75
N$17
  Top 0.254: R13.2 21.08,142.19 JP9.3
N$18
  Top 0.254: JP9.1 22.95,144.17 R14.2
N$19  (via drill 0.51)
  Top 0.508: J31.2 15.23,158.07 13.83,156.67 13.83,155.01 F5.1 11.58,152.76 v10.16,152.76
  Top 1.27: J31.2 J31.4
  Bottom 0.508: JP10.1 10.67,153.27 v10.16,152.76
SCL  (via drill 0.38, 0.51)
  Top 0.254: J4.4 67.8,18.77 v68.78,17.79 | v68.79,26.38 67.77,27.41 J7.4 | v34.29,14.96 J5.4 | v24.21,15.98 v24.22,15.99 24.22,16.51 | v24.22,18 24.22,16.51 | R2.1 24.2,16.5 24.22,16.51 | J6.4 47.75,14.99 v47.72,14.96
  Bottom 0.254: v68.79,26.38 v68.78,26.38 v68.78,17.79 68.78,16.56 67.89,15.67 47.75,15.67 | 34.29,15.67 24.51,15.67 v24.21,15.98 | v34.29,14.96 34.29,15.67 | 34.29,15.67 47.75,15.67 | v47.72,14.96 47.72,15.64 47.75,15.67 | J1.5 20.31,18.68 20.99,18 v24.22,18
SCL1  (via drill 0.38, 0.51)
  Top 0.254: J8.4 67.8,49.78 v68.78,48.8 | v68.79,57.39 67.77,58.42 J9.4 | v34.29,45.97 J13.4 | v24.21,46.98 v24.22,46.99 24.22,47.52 | v24.22,49.01 24.22,47.52 | R5.1 24.2,47.5 24.22,47.52 | J14.4 47.75,45.99 v47.72,45.97
  Bottom 0.254: v68.79,57.39 v68.78,57.39 v68.78,48.8 68.78,47.57 67.89,46.68 47.75,46.68 | 34.29,46.68 24.51,46.68 v24.21,46.98 | v34.29,45.97 34.29,46.68 | 34.29,46.68 47.75,46.68 | v47.72,45.97 47.72,46.65 47.75,46.68 | J10.5 20.31,49.69 20.99,49.01 v24.22,49.01
SCL2  (via drill 0.38, 0.51)
  Top 0.254: J15.4 67.8,80.79 v68.78,79.81 | v68.79,88.4 67.77,89.42 J16.4 | v34.29,76.98 J20.4 | v24.21,77.99 24.22,78 24.22,78.53 | v24.22,80.02 24.22,78.53 | R8.1 24.2,78.51 24.22,78.53 | J21.4 47.75,77 v47.72,76.98
  Bottom 0.254: v68.79,88.4 v68.78,88.39 v68.78,79.81 68.78,78.58 67.89,77.69 47.75,77.69 | 34.29,77.69 24.51,77.69 v24.21,77.99 | v34.29,76.98 34.29,77.69 | 34.29,77.69 47.75,77.69 | v47.72,76.98 47.72,77.66 47.75,77.69 | J17.5 20.31,80.7 20.99,80.02 v24.22,80.02
SCL3  (via drill 0.38, 0.51)
  Top 0.254: J22.4 67.8,111.8 v68.78,110.81 | v68.79,119.41 67.77,120.43 J23.4 | v34.29,107.98 v34.29,107.99 J27.4 | v24.21,109 24.22,109.01 24.22,109.53 | v24.22,111.03 24.22,109.53 | R11.1 24.2,109.52 24.22,109.53 | J28.4 47.75,108.01 v47.72,107.98
  Bottom 0.254: v68.79,119.41 v68.78,119.4 v68.78,110.81 68.78,109.59 67.89,108.7 47.75,108.7 | 34.29,108.7 24.51,108.7 v24.21,109 | v34.29,107.98 34.29,108.7 | 34.29,108.7 47.75,108.7 | v47.72,107.98 47.72,108.67 47.75,108.7 | J24.5 20.31,111.7 20.99,111.03 v24.22,111.03
SCL4  (via drill 0.38, 0.51)
  Top 0.254: J29.4 67.8,142.81 v68.78,141.82 | v68.79,150.41 67.77,151.44 J30.4 | v34.29,138.99 v34.29,139 J34.4 | v24.21,140.01 v24.22,140.02 24.22,140.54 | v24.22,142.03 24.22,140.54 | R14.1 24.2,140.53 24.22,140.54 | J35.4 47.75,139.02 v47.72,138.99
  Bottom 0.254: v68.79,150.41 v68.78,150.41 v68.78,141.82 68.78,140.6 67.89,139.7 47.75,139.7 | 34.29,139.7 24.51,139.7 v24.21,140.01 | v34.29,138.99 34.29,139.7 | 34.29,139.7 47.75,139.7 | v47.72,138.99 47.72,139.68 47.75,139.7 | J31.5 20.31,142.71 20.99,142.03 v24.22,142.03
SDA  (via drill 0.38, 0.51)
  Top 0.254: J4.3 67.18,17.77 v67.94,17.01 | v67.95,25.57 67.11,26.41 J7.3 | R1.1 20.31,16.45 v19.84,16.92 | v46.75,19.05 J6.3 | v33.29,19.05 J5.3
  Bottom 0.254: v67.95,25.57 v67.94,25.57 v67.94,17.01 67.81,17.01 66.98,16.18 46.74,16.18 | 46.74,16.18 33.29,16.18 33.29,16.26 | 33.29,16.26 33.21,16.18 25.45,16.18 24.71,16.92 v19.84,16.92 19.65,17.11 19.65,30.64 18.23,32.06 J1.3 | v33.29,19.05 33.29,16.26 | v46.75,19.05 46.75,16.19 46.74,16.18
SDA1  (via drill 0.38, 0.51)
  Top 0.254: J8.3 67.18,48.78 v67.94,48.01 | v67.95,56.58 67.11,57.42 J9.3 | R4.1 20.31,47.45 v19.84,47.92 | v46.75,50.06 J14.3 | v33.29,50.06 J13.3
  Bottom 0.254: v67.95,56.58 v67.94,56.58 v67.94,48.01 67.81,48.01 66.98,47.19 46.74,47.19 | 46.74,47.19 33.29,47.19 33.29,47.26 | 33.29,47.26 33.21,47.19 25.45,47.19 24.71,47.92 v19.84,47.92 19.65,48.11 19.65,61.65 18.23,63.07 J10.3 | v33.29,50.06 33.29,47.26 | v46.75,50.06 46.75,47.2 46.74,47.19
SDA2  (via drill 0.38, 0.51)
  Top 0.254: J15.3 67.18,79.79 v67.94,79.02 | v67.95,87.59 67.11,88.42 J16.3 | R7.1 20.31,78.46 v19.84,78.93 | v46.75,81.07 J21.3 | v33.29,81.07 J20.3
  Bottom 0.254: v67.95,87.59 v67.94,87.59 v67.94,79.02 67.81,79.02 66.98,78.2 46.74,78.2 | 46.74,78.2 33.29,78.2 33.29,78.27 | 33.29,78.27 33.21,78.2 25.45,78.2 24.71,78.93 v19.84,78.93 19.65,79.12 19.65,92.66 18.23,94.07 J17.3 | v33.29,81.07 33.29,78.27 | v46.75,81.07 46.75,78.21 46.74,78.2
SDA3  (via drill 0.38, 0.51)
  Top 0.254: J22.3 67.18,110.8 v67.94,110.03 | v67.95,118.6 67.11,119.43 J23.3 | R10.1 20.31,109.47 v19.84,109.94 | v46.75,112.07 J28.3 | v33.29,112.07 J27.3
  Bottom 0.254: v67.95,118.6 v67.94,118.6 v67.94,110.03 67.81,110.03 66.98,109.2 46.74,109.2 | 46.74,109.2 33.29,109.2 33.29,109.28 | 33.29,109.28 33.21,109.2 25.45,109.2 24.71,109.94 v19.84,109.94 19.65,110.13 19.65,123.67 18.23,125.08 J24.3 | v33.29,112.07 33.29,109.28 | v46.75,112.07 46.75,109.22 46.74,109.2
SDA4  (via drill 0.38, 0.51)
  Top 0.254: J29.3 67.18,141.81 v67.94,141.04 | v67.95,149.61 67.11,150.44 J30.3 | R13.1 20.31,140.48 v19.84,140.95 | v46.75,143.08 J35.3 | v33.29,143.08 J34.3
  Bottom 0.254: v67.95,149.61 v67.94,149.61 v67.94,141.04 67.81,141.04 66.98,140.21 46.74,140.21 | 46.74,140.21 33.29,140.21 33.29,140.29 | 33.29,140.29 33.21,140.21 25.45,140.21 24.71,140.95 v19.84,140.95 19.65,141.14 19.65,154.68 18.23,156.09 J31.3 | v33.29,143.08 33.29,140.29 | v46.75,143.08 46.75,140.23 46.74,140.21

## Text on the board
Bottom: v30 | v30 | v30 | v30 | v30
tPlace: - | + | - | + | - | + | - | + | - | +
bPlace: - | + | - | + | - | + | - | + | - | +
Milling: v-score | v-score | v-score | v-score | v-score | v-score | v-score | v-score
Measures: Units in MM | Units in MM | Units in MM | Units in MM | Units in MM
tDocu: N. Seidle | A. England and Elias Santistevan | N. Seidle | A. England and Elias Santistevan | N. Seidle | A. England and Elias Santistevan | N. Seidle | A. England and Elias Santistevan | N. Seidle | A. England and Elias Santistevan